# Altium PCB triumvi_integrated_v2_config.PcbDoc
Units mil, origin at the board's own origin, x right, y up, seen from the top; angles counter-clockwise.
Board outline 2449.06 x 760 mil, 2 copper layers (Top Layer, Bottom Layer); 17 components, 30 nets, 116 pads, 43 vias.
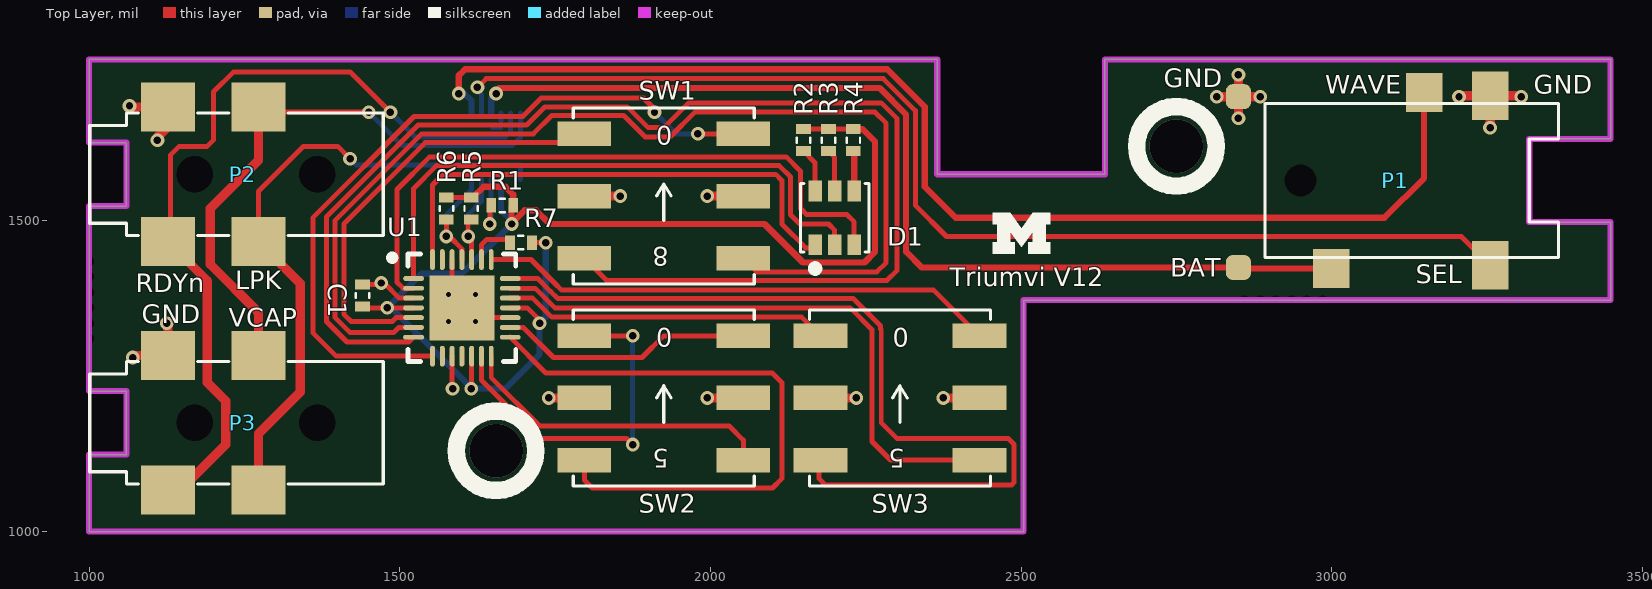
[diagram p0: Top Layer view]
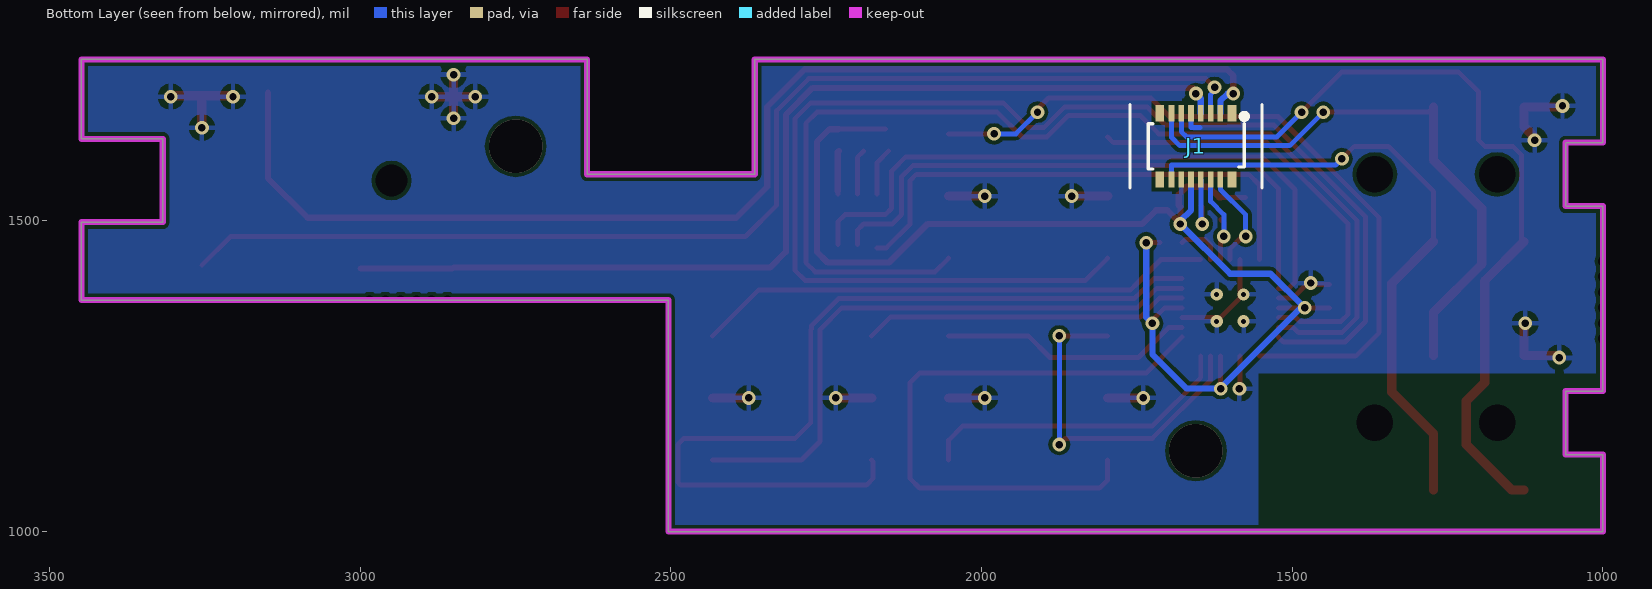
[diagram p1: Bottom Layer view, seen from below]

## Layer stack, top to bottom
Top Solder: solder mask 0.4, Solder Resist, Dk 3.5
Top Layer: signal copper 1.4
Dielectric 1: dielectric 12.6, FR-4, Dk 4.8
Bottom Layer: signal copper 1.4
Bottom Solder: solder mask 0.4, Solder Resist, Dk 3.5

## Board outline
1000,1000 1000,1123.82 1060,1123.82 1060,1226.18 1000,1226.18 1000,1523.82 1060,1523.82 1060,1626.18 1000,1626.18 1000,1760 2365,1760 2365,1575 2635,1575 2635,1760 3449.06,1760 3449.06,1631.93 3318.11,1631.93 3318.11,1498.07 3449.06,1498.07 3449.06,1372.48 2504.06,1372.48 2504.06,1000

## Design rules (kind name [scope] priority, off if disabled: settings)
Clearance "non plated holes" [InPadClass('NPHOLES')] p1: gap=10 // Sunstone Circuits Minimum Clearance Rule (MLB~4&6 Layer Designs)
Clearance "Clearance~Sunstone Circuits" [All] p2: gap=6 // Sunstone Circuits Minimum Clearance Rule (MLB~4&6 Layer Designs)
DiffPairsRouting [All] p1: maxlimit=10 minlimit=10 mostfreqgap=10 toplayer_minwidth=6 toplayer_maxwidth=15 toplayer_prefwidth=15 bottomlayer_minwidth=6 bottomlayer_maxwidth=15 bottomlayer_prefwidth=15 maxuncoupledlength=500
HoleSize "HoleSize~Sunstone Circuits" [All] p1: absolutevalues=TRUE maxlimit=251 minlimit=8 maxpercent=80.000 minpercent=20.000 // Sunstone Circuits Hole Size Rule (MLB~4&6 Layer Designs)
HoleSize Testpoint [All] p2: absolutevalues=TRUE maxlimit=100 minlimit=1 maxpercent=80.000 minpercent=20.000
HoleSize TestPointUsage [All] p3: absolutevalues=TRUE maxlimit=100 minlimit=1 maxpercent=80.000 minpercent=20.000
MinimumAnnularRing "MinimumAnnularRing~Sunstone Circuits" [All] p1 off: minimumring=7 // Sunstone Circuits Minimum Annular Ring (MLB~4&6 Layer Designs)
MinimumSolderMaskSliver [All] p1 off: minsoldermaskwidth=10
PlaneClearance "PlaneClearance~Sunstone Circuits" [All] p1: clearance=12 // Sunstone Circuits Power Plane Clearance Rule (MLB~4&6 Layer Designs)
PlaneConnect "PlaneConnect~Sunstone Circuits" [All] p1: planeconnectstyle=Relief reliefexpansion=10 reliefentries=4 reliefconductorwidth=8 reliefairgap=10 // Sunstone Circuits Power Plane Connect Rule (MLB~4&6 Layer Designs)
PolygonConnect "PolygonConnect~Sunstone Circuits" [All] p1: connectstyle=Relief reliefconductorwidth=8 reliefentries=4 polygonreliefangle="90 Angle" airgapwidth=10 // Sunstone Circuits Polygon Connect Style (MLB~4&6 Layer Designs)
RoomDefinition config [InComponentClass('config')] p1 off: confinementstyle=ConfineIn formatcopy=TRUE lockcomponents=FALSE outline 987.5,1013.36 987.5,1736.64 2880.41,1736.64 2880.41,1754.79 3459.09,1754.79 3459.09,1375.21 2490.26,1375.21 2490.26,1060.77 1485.89,1060.77 1485.89,1013.36
RoutingVias "RoutingVias~Sunstone Circuits" [All] p1: holewidth=16 width=30 viastyle="Through Hole" minholewidth=6 minwidth=18 maxholewidth=20 maxwidth=40 // Sunstone Circuits Routing Vias Rule (MLB~4&6 Layer Designs)
ShortCircuit "ShortCircuit~Sunstone Circuits" [All] p1: allowed=FALSE // Sunstone Circuits Short Circuit Rule~Do Not Allow (MLB~4&6 Layer Designs)
SilkToSilkClearance [All] p1 off: silktosilkclearance=10
SilkToSolderMaskClearance [IsPad] p1 off: minsilkscreentomaskgap=10 clearancetoexposedcopper=TRUE
SolderMaskExpansion TentVias [isVia] p1: expansion=-20 // Sunstone Circuits Solder Mask Expansion Rule (MLB~4&6 Layer Designs)
SolderMaskExpansion "SolderMaskExpansion~Sunstone Circuits" [All] p2: expansion=3 // Sunstone Circuits Solder Mask Expansion Rule (MLB~4&6 Layer Designs)
ViasUnderSMD "ViasUnderSMD~Sunstone Circuits" [All] p1: allowed=FALSE // Sunstone Circuits Vias Under SMD~Do Not Allow (MLB~4&6 Layer Designs)
Width "Width~Sunstone Circuits" [All] p1: maxlimit=100 minlimit=6 preferedwidth=10 // Sunstone Circuits Minimum Width Rule (MLB~4&6 Layer Designs)
22 further rules are at their usual default settings.

## Components (designator, comment, footprint, x,y, rotation, side; value= is the part's Value field where it differs from the comment)
C1 "0.1u" 0402 1440,1380 r90 top
D1 "CLY6D-FKC" PLCC6 2200,1505 r90 top
J1 "DF40C-12DP-0.4V" DF40C-12DP-0.4V 1655,1620 r0 bottom locked
P1 "PJ3516S-041" PJ3516S-041 3365.35,1565 r180 top locked
P2 "PJ2505S-041" PJ2505S-041 1060,1575 r0 top locked
P3 "PJ2505S-041" PJ2505S-041 1060,1175 r0 top locked
R1 "100k" 0402 1665,1525 r180 top
R2 "110" 0402 2150,1630 r270 top
R3 "220" 0402 2190,1630 r270 top
R4 "324" 0402 2230,1630 r270 top
R5 "10k" 0402 1615,1520 r270 top
R6 "10k" 0402 1575,1520 r270 top
R7 "100k" 0402 1695,1465 r180 top
SW1 "SH-7050TA" SH-7050A 1925,1540 r0 top
SW2 "SH-7010TA" SH-7010A 1925,1215 r0 top
SW3 "SH-7010TA" SH-7010A 2305,1215 r0 top
U1 "SX1509B" QFN40P400X400X60_HS-29N 1600,1360 r0 top

## Footprints (in the part's own frame and the unit in brackets; to place one, negate y for a bottom-side part, rotate by r counter-clockwise, add the part's x,y. Pads: shape width x height; smd on the part's side, far side on the other; paste and mask are expansions set on the pad)
0402 [mm] "2-Leads, Body 1.00x0.50mm, IPC Medium Density"
  rect 0.4x0.6 smd: 1(-0.45,0) 2(0.45,0)
  silkscreen extent -0.1,-0.28 0.1,0.28, body extent -0.53,-0.28 0.53,0.27, height 0.4
DF40C-12DP-0.4V [mm] "Hirose DF40 Series, 0.4mm pitch, 12 positions"
  rect 0.23x0.66 smd: 1(-1,-1.355) 2(-0.6,-1.355) 3(-0.2,-1.355) 4(0.2,-1.355) 5(0.6,-1.355) 6(1,-1.355) 7(1,1.355) 8(0.6,1.355) 9(0.2,1.355) 10(-0.2,1.355) 11(-0.6,1.355) 12(-1,1.355)
  rect 0.35x0.66 smd: ""(-1.475,-1.355) ""(-1.475,1.355) ""(1.475,-1.355) ""(1.475,1.355)
  silkscreen extent -2.7,-1.7 2.7,1.7, body extent -1.97,-1.49 1.95,1.48, height 1.09
PJ2505S-041 [mm] "2.5 mm phone jack, 4 terminals"
  rect 2.2x2 smd: 1(1.7,2.75) 2(1.7,-2.75) 3(5.4,2.75) 4(5.4,-2.75)
  round 0 hole 1.5 unplated: ""(2.8,0) ""(7.8,0)
  Keep-Out Layer lines w0.127: -1.524,-1.3 0,-1.3 0,1.3 -1.524,1.3
  silkscreen extent -1.5,-2.5 10.5,2.5, body extent -1.5,-3.1 10.5,2.9, height 3.7
PJ3516S-041 [mm] "Switchtech Enterprise LTD. 3.5mm phone jack"
  rect 1.5x2 smd: 1(2.8,-3.465) 2(2.8,3.465)
  rect 1.5x1.6 smd: 3(5.5,-3.6) 4(9.3,3.6)
  rect 0x0 hole 1.3 unplated: ""(10.55,0)
  Keep-Out Layer lines w0.254: -2,1.7 1.2,1.7 1.2,-1.7 -2,-1.7
  silkscreen extent 0,-3.15 12,3.15, body extent -2,-3.15 12,3.15, height 4.5
PLCC6 [mm] "CREE PLCC6 LED"
  rect 0.85x0.55 smd: 1(-1.1,0.8) 2(-1.1,0) 3(-1.1,-0.8) 4(1.1,-0.8) 5(1.1,0) 6(1.1,0.8)
  silkscreen extent -2.22,-1.4 1.4,1.4, body extent -1.7,-1.4 1.7,1.4, height 1.85
QFN40P400X400X60_HS-29N [mm] "QFN, 28-Leads, Body 4.00x4.00mm, Pitch 0.40mm, Thermal Pad 2.65x2.65mm, IPC Medium Density"
  oval 0.85x0.2 smd: 1(-1.975,1.2) 2(-1.975,0.8) 3(-1.975,0.4) 4(-1.975,0) 5(-1.975,-0.4) 6(-1.975,-0.8) 7(-1.975,-1.2) 15(1.975,-1.2) 16(1.975,-0.8) 17(1.975,-0.4) 18(1.975,0) 19(1.975,0.4) 20(1.975,0.8) 21(1.975,1.2)
  oval 0.2x0.85 smd: 8(-1.2,-1.975) 9(-0.8,-1.975) 10(-0.4,-1.975) 11(0,-1.975) 12(0.4,-1.975) 13(0.8,-1.975) 14(1.2,-1.975) 22(1.2,1.975) 23(0.8,1.975) 24(0.4,1.975) 25(0,1.975) 26(-0.4,1.975) 27(-0.8,1.975) 28(-1.2,1.975)
  rect 2.65x2.65 smd: 29(0,0)
  silkscreen extent -2.97,-2.2 2.2,2.2, body extent -2.05,-2.05 2.05,2.05, height 0.6
SH-7010A [mm] "Rotary Coded Switch, SH-7000 series, 10 positions, real code, J hook"
  rect 2.2x1 smd: 1(-3.25,2.54) 2(3.25,-2.54) 4(-3.25,-2.54) 8(3.25,2.54) C(-3.25,0) C(3.25,0)
  silkscreen extent -3.7,-3.6 3.7,3.6, body extent -3.75,-3.65 3.75,3.65, height 3.77
SH-7050A [mm] "Rotary Coded Switch, SH-7000 series, 16 positions, real code, J hook"
  rect 2.2x1 smd: 1(-3.25,2.54) 2(3.25,-2.54) 4(-3.25,-2.54) 8(3.25,2.54) C(-3.25,0) C(3.25,0)
  silkscreen extent -3.7,-3.6 3.7,3.6, body extent -3.75,-3.65 3.75,3.65, height 3.77

## Part data
C1: library part GRM155R71C104KA88D, "0.10μF ±10% 16V Ceramic Capacitor X7R 0402"
D1: library part CLY6D-FKC-CK1N1D1BB7D3D3, "Red, Green, Blue (RGB) 622nm Red, 530nm Green, 470nm Blue LED Indication - Discrete 2.1V Red, 3V Green, 3V Blue 6-SMD, J-Lead"
J1: "Hirose BM20 Series, 0.4mm pitch, 12 pos, header"
P1: "3.5 mm phone jack, 4 terminals"
P2 P3: "2.5 mm phone jack, 4 terminals"
R1 R7: library part CRCW0402100KFKED, "RES SMD 100K OHM 1% 1/16W 0402"
R2: library part CRCW0402110RFKED, "RES SMD 110 OHM 1% 1/16W 0402"
R3: library part CRCW0402220RFKED, "RES SMD 220 OHM 1% 1/16W 0402"
R4: library part CRCW0402324RFKED, "RES SMD 324 OHM 1% 1/16W 0402"
R5 R6: library part CRCW040210K0FKED, "RES SMD 10K OHM 1% 1/16W 0402"
SW1 SW2 SW3: "ROTARY CODED SWITCHES"
U1: "Voltage Level Shifting GPIO  with LED Driver and Keypad Engine"

## Free pads (board coordinates)
  round 0 hole 20: ""(997.5,1310) ""(997.5,1335) ""(997.5,1360) ""(997.5,1385) ""(997.5,1410) ""(997.5,1435) ""(2860,1370) ""(2885,1370) ""(2910,1370) ""(2935,1370) ""(2960,1370) ""(2985,1370)
  rrect50% 40x40 smd: ""(2850,1425) ""(2850,1700)

## Via types
v1: diameter 22, hole 12, Top Layer to Bottom Layer, 37 vias
v2: diameter 19.68, hole 8, Top Layer to Bottom Layer, 4 vias
v3: diameter 86, hole 86, Top Layer to Bottom Layer, 2 vias

## Nets (pads, with @x,y where several pads share a name; then routed paths per layer and width w, separated by ;. In a path a pad name is that pad's centre, name@x,y a point inside that pad or via, vN(x,y) a via of type N, cw(c..) or ccw(c..) an arc to the next point about the centre after c; other vN are vias at no path point)
BATTERYPACKDETECT: J1.10 R1.2 | length 103.5
  Top Layer w8: v1(1645,1495) 1645,1522.72 R1.2
  Bottom Layer w8: v1(1645,1495) 1647.13,1497.13 J1.10
BATTERYPACKPOWER: C1.1 J1.9 R1.1 R2.1 R3.1 R4.1 R5.1 R6.1 R7.1 U1.4 U1.12 U1.18 | length 2172.7
  Top Layer w8: C1.1@1440,1360 v1(1480,1360) U1.4 ; R6.1 R5.1 ; v1(1615,1230) 1615.75,1230.75 U1.12 ; U1.18 1705,1360 1730,1335 1725,1330 v1(1725,1335) ; R7.1 v1(1735,1465) ; R2.1@2155,1647.72 R3.1 R4.1
  Top Layer w10: R5.1 1617.72,1537.72 1635,1555 1670,1555 1682.72,1542.28 R1.1 1680,1522.28 v1@1680,1496.11 ; v1(1680,1495) v1@1680,1496.11 ; R4.1 2230.19,1647.52 2245,1647.52 2265,1627.52 2265,1450 2248.04,1433.04 2149.04,1433.04 2087.08,1495 1741.11,1495 1719.11,1517 1700.89,1517 v1@1680,1496.11
  Bottom Layer w10: J1.9 1662.87,1517.13 1680,1500 v1(1680,1495) 1600,1415 1535,1415 v1(1480,1360) 1486.11,1360 1615,1231.11 v1(1615,1230) 1670,1230 1725,1285 v1(1725,1335) 1735,1345 v1(1735,1465)
EXT_VOLT_SEL: J1.2 P1.2 | length 1893.9
  Top Layer w8: v1(1625,1715) 1639,1729 2278.43,1729 2330,1677.43 2330,1525 2380,1475 3208.7,1475 P1.2
  Bottom Layer w8: v1(1625,1715) 1625,1710 1631.38,1703.62 J1.2
EXT_VOLT_WAVE: J1.1 P1.3 | length 1968.2
  Top Layer w10: v1(1595,1705) 1595,1734 1603,1742 ; 1605,1744 2284.64,1744 2345,1683.64 2345,1555 2395,1505 3085,1505 3148.82,1568.82 P1.3
  Bottom Layer w10: v1(1595,1705) 1603.89,1705 1615.63,1693.26 J1.1
GND: C1.2 J1.4 J1.8 P1.1 P2.1 P3.1 pad.@2850,1700 SW1.C SW2.C SW3.C U1.3 U1.10 U1.17 U1.26 U1.29 | length 1225.1
  Top Layer w8: C1.2 1467.72,1397.72 v1(1470,1400) 1475,1400 1499.25,1375.75 U1.3 ; U1.10 1584.25,1230.75 v1(1585,1230) ; U1.26 1584.25,1375.75 U1.29 1615.75,1344.25 U1.17
  Top Layer w15: v1(1065,1685) 1066.73,1683.27 P2.1 1126.93,1651.93 1110,1635 v1(1110,1630) ; v1(1070,1280) 1073.27,1283.27 P3.1 1126.93,1333.07 v1(1125,1335) ; v1(1740,1215) SW2.C@1797.05,1215 ; SW1.C@1797.05,1540 v1(1855,1540) ; v1(1995,1215) SW2.C@2052.95,1215 ; v1(1995,1540) SW1.C@2052.95,1540 ; SW3.C@2177.05,1215 v1(2235,1215) ; v1(2375,1215) SW3.C@2432.95,1215 ; v1(2815,1700) pad.@2850,1700 ; v1(2850,1665) pad.@2850,1700 ; v1(2850,1735) pad.@2850,1700 ; v1(2885,1700) pad.@2850,1700 ; v1(3205,1700) 3206.42,1701.42 P1.1 ; v1(3255,1650) 3255.12,1650.12 P1.1 ; v1(3305,1700) 3303.58,1701.42 P1.1
  Bottom Layer w8: 1648.35,1650.35 1662.87,1650.35 J1.4
  other v2: 1578.35,1338.35 1621.65,1338.35 1578.35,1381.65 1621.65,1381.65
I2C_SCL: J1.12 R6.2 U1.25 | length 186.3
  Top Layer w8: R6.2 v1(1575,1475) 1580,1475 1600,1455 U1.25
  Bottom Layer w8: v1(1575,1475) 1575,1510 1615.63,1550.63 J1.12
I2C_SDA: J1.11 R5.2 U1.24 | length 169.5
  Top Layer w8: R5.2 1610,1497.28 v1(1610,1475) 1615.75,1469.25 U1.24
  Bottom Layer w8: v1(1610,1475) 1610,1510 1631.38,1531.38 J1.11
NetD1_1: D1.1 U1.28 | length 832.9
  Top Layer w8: U1.28 1552.76,1557.76 1570,1575 2105,1575 2115,1565 2115,1495 2153.31,1456.69 D1.1@2168.5,1456.69
NetD1_2: D1.2 U1.1 | length 940
  Top Layer w8: U1.1 1522.24,1552.24 1559,1589 2110.8,1589 2129,1570.8 2129,1510 2144,1495 2190,1495 2200,1485 D1.2
NetD1_3: D1.3 U1.2 | length 1052.9
  Top Layer w8: U1.2 1505.49,1391.5 1495.51,1401.47 1495.51,1550.51 1548,1603 2122,1603 2145,1580 2145,1520 2155,1510 2220,1510 2231.5,1498.5 D1.3
NetD1_4: D1.4 R4.2 | length 69.6
  Top Layer w8: D1.4@2231.5,1543.31 D1.4
  Top Layer w10: R4.2 2231.5,1610.79 D1.4
NetD1_5: D1.5 R3.2 | length 73.1
  Top Layer w8: R3.2 2200,1602.28 D1.5 D1.5@2200,1543.31
NetD1_6: D1.6 R2.2 | length 76.6
  Top Layer w8: R2.2 2168.5,1593.78 D1.6 D1.6@2168.5,1543.31
NetR7_2: R7.2 U1.23 | length 75.1
  Top Layer w8: U1.23 1631.5,1461.5 1640,1470 1672.28,1470 R7.2
NetSW1_1: SW1.1 U1.5 | length 709.7
  Top Layer w8: U1.5 1493.95,1344.25 1487.89,1338.19 1421.81,1338.19 1410,1350 1410,1495 1541,1626 1788.05,1626 SW1.1@1797.05,1635
NetSW1_2: SW1.2 U1.6 | length 1760.9
  Top Layer w8: U1.6 1498.5,1328.5 1490,1320 1420.2,1320 1396,1344.2 1396,1500.8 1535.2,1640 1715,1640 1744.69,1669.69 1860.31,1669.69 1895,1635 1935,1635 1975,1675 2265,1675 2282.81,1657.19 2282.81,1432.81 2268.04,1418.04 2074.91,1418.04 SW1.2
NetSW1_4: SW1.4 U1.7 | length 2127.4
  Top Layer w8: U1.7 1514.49,1305 1415,1305 1382,1338 1382,1506.6 1529.4,1654 1704,1654 1733.69,1683.69 1866.11,1683.69 1899.8,1650 1925,1650 1965,1690 2275,1690 2300,1665 2300,1420 2284.04,1404.04 1833.01,1404.04 SW1.4
NetSW1_8: SW1.8 U1.8 | length 1193
  Top Layer w8: U1.8 1397.76,1282.24 1360,1320 1360,1505 1523,1668 1698,1668 1727.69,1697.69 1892.31,1697.69 1910,1680 v1(1910,1675) ; v1(1980,1640) SW1.8
  Bottom Layer w8: v1(1910,1675) 1945,1640 v1(1980,1640)
NetSW2_1: SW2.1 U1.13 | length 578
  Top Layer w8: U1.13 1631.5,1243.7 1725.2,1150 1865,1150 v1(1875,1140) ; SW2.1 v1(1875,1315)
  Bottom Layer w8: v1(1875,1140) v1(1875,1315)
NetSW2_2: SW2.2 U1.14 | length 514
  Top Layer w8: U1.14 1647.24,1247.76 1725,1170 2030,1170 2052.95,1147.05 SW2.2
NetSW2_4: SW2.4 U1.15 | length 984
  Top Layer w8: U1.15 1735.51,1255 2100,1255 2115,1240 2115,1085 2100,1070 1810,1070 1797.05,1082.95 SW2.4
NetSW2_8: SW2.8 U1.16 | length 409.8
  Top Layer w8: U1.16 1699,1328.5 1747.5,1280 1890,1280 1925,1315 SW2.8
NetSW3_1: SW3.1 U1.19 | length 524.5
  Top Layer w8: U1.19 1713.91,1375.75 1731.66,1358 ; 1731.7,1358 1744.7,1345 2147.05,1345 SW3.1
NetSW3_2: SW3.2 U1.20 | length 975.2
  Top Layer w8: U1.20 1717.96,1391.5 1737.46,1372 ; 1737.5,1372 1749.5,1360 2225,1360 2260,1325 2260,1145 2290,1115 SW3.2
NetSW3_4: SW3.4 U1.21 | length 1424.3
  Top Layer w8: U1.21 1722.01,1407.24 1743.26,1386 ; 1743.3,1386 1754.3,1375 2229.8,1375 2274,1330.8 2274,1326 2275,1325 2275,1175 2300,1150 2479.06,1150 2489.06,1140 2489.06,1079.06 2485,1075 2185,1075 2175,1085 2175,1112.95 SW3.4
NetSW3_8: SW3.8 U1.22 | length 836.6
  Top Layer w8: U1.22 1711.3,1437.76 1749.06,1400 ; 1749.1,1400 1760.1,1389 2358.95,1389 SW3.8
R\D\Y\_\I\N\: J1.5 P2.2 P3.2 | length 1355
  Top Layer w8: P2.2 1130.71,1470.51 1130.71,1605.71 1145,1620 1190,1620 1200,1630 1200,1707.49 1232.51,1740 1420,1740 v1(1485,1675)
  Top Layer w15: P3.2 1146.73,1066.73 1220,1140 1220,1210 1190,1240 1190,1403.66 P2.2
  Bottom Layer w8: v1(1485,1675) 1525,1635 1670,1635 1678.62,1643.62 J1.5
V_BATT: J1.3 P1.4 pad.@2850,1425 | length 1633.1
  Top Layer w10: v1@1660,1705 1660,1714 2272.21,1714 2315,1671.21 2315,1450 2340,1425 2850,1425 2851.73,1423.27 P1.4
  Bottom Layer w10: J1.3 1647.13,1697.13 v1(1655,1705)
VCAP: J1.6 P2.3 P3.3 | length 956.4
  Top Layer w8: P2.3 1280.87,1675 v1(1450,1675)
  Top Layer w15: P3.3 1272.6,1352.4 1195,1430 1195,1519.8 1272.6,1597.4 P2.3
  Bottom Layer w8: v1(1450,1675) 1504,1621 1681,1621 1694.37,1634.37 J1.6
VCAP_LOOPBACK: J1.7 P2.4 P3.4 | length 1024
  Top Layer w8: P2.4 1272.6,1547.6 1345,1620 1400,1620 v1(1420,1600)
  Top Layer w15: P3.4 1272.6,1157.3 1340,1224.7 1340,1399.33 P2.4
  Bottom Layer w8: v1(1420,1600) 1430,1590 1610,1590 1610.35,1589.65 1694.37,1589.65 J1.7
pads on no net: J1. P1. P2. P3. U1.9 U1.11 U1.27
copper on no net:
  other v3: 1655,1130 2750,1620

## Polygon pours and split planes (outlines as drawn)
GND on Bottom Layer "Top Layer-No Net" (solid, pour order 0): 1000,1000 1000,1123.82 1060,1123.82 1060,1226.18 1000,1226.18 1000,1523.82 1060,1523.82 1060,1626.18 1000,1626.18 1000,1760 2365,1760 2365,1575 2635,1575 2635,1760 3449.06,1760 3449.06,1631.93 3318.11,1631.93 3318.11,1498.07 3449.06,1498.07 3449.06,1372.48 2504.06,1372.48 2504.06,1000

## Keep-outs
Keep-Out Layer:
  the board outline again, w10

## Other copper
Bottom Layer:
  pour cut-out: 1000,1000 1000,1255 1555,1255 1555,1000

## Silkscreen, mask and mechanical layers (free items; w line width, h text height)
Top Overlay:
  circle w28: c2750,1620 r64
  circle w28: c1655,1130 r64
  region: 2454.48,1446.96 2489.77,1446.96 2489.77,1465.8 2482.59,1465.8 2482.59,1482.84 2500.08,1458.32 2501.28,1458.32 2519.07,1482.84 2519.07,1465.8 2511.89,1465.8 2511.89,1446.96 2547.18,1446.96 2547.18,1465.8 2540,1465.8 2540,1494.2 2547.18,1494.2 2547.18,1513.04 2519.22,1513.04 2501.28,1488.22 2500.38,1488.22 2482.44,1513.04 2454.48,1513.04 2454.48,1494.2 2461.36,1494.2 2461.36,1465.8 2454.48,1465.8
  text "GND" at 2730,1715 h30
  text "WAVE" at 2990,1705 h30
  text "GND" at 3325,1705 h30
  text "BAT" at 2740,1410 h30
  text "SEL" at 3135,1400 h30
  text "Triumvi V12" at 2385,1395 h30
  text "LPK" at 1235,1390 h30
  text "RDYn" at 1075,1385 h30
  text "GND" at 1085,1335 h30
  text "VCAP" at 1225,1330 h30
Mechanical 14:
  lines w40: 980,950 980,1145 1040,1145 1040,1205 980,1205 980,1305 ; 980,1440 980,1545 1040,1545 1040,1605 980,1605 980,1810 ; 2525,950 2525,1350 2855,1350 ; 2990,1350 3470.94,1350 3470.94,1520 3340,1520 3340,1610 3469.06,1610 3469.06,1810 ; 2385,1595 2615,1595 2615,1760 2385,1760 2385,1595
Mechanical 16:
  lines w20: 900,1000 3550,1000 ; 900,1760 3550,1760

## Text inside footprints (layer, text, board x,y; h text height)
J1: Mechanical 15 "keepout" at 1780.98,1521.57 h30 r270; Mechanical 15 "keepout" at 1532.95,1714.49 h30 r90
SW1: Top Overlay "0" at 1913.19,1622.68 h30; Top Overlay "8" at 1932.87,1457.32 h30 r180
SW2: Top Overlay "0" at 1913.19,1297.68 h30; Top Overlay "5" at 1932.87,1132.32 h30 r180
SW3: Top Overlay "0" at 2293.19,1297.68 h30; Top Overlay "5" at 2312.87,1132.32 h30 r180